# Altium PCB PCB1.PcbDoc
Units mm, origin at the board's own origin, x right, y up, seen from the top; angles counter-clockwise.
Board outline 102 x 102 mm, 2 copper layers (Top Layer, Bottom Layer), stack 1.57 mm thick; 75 components, 45 nets, 245 pads, 31 vias.
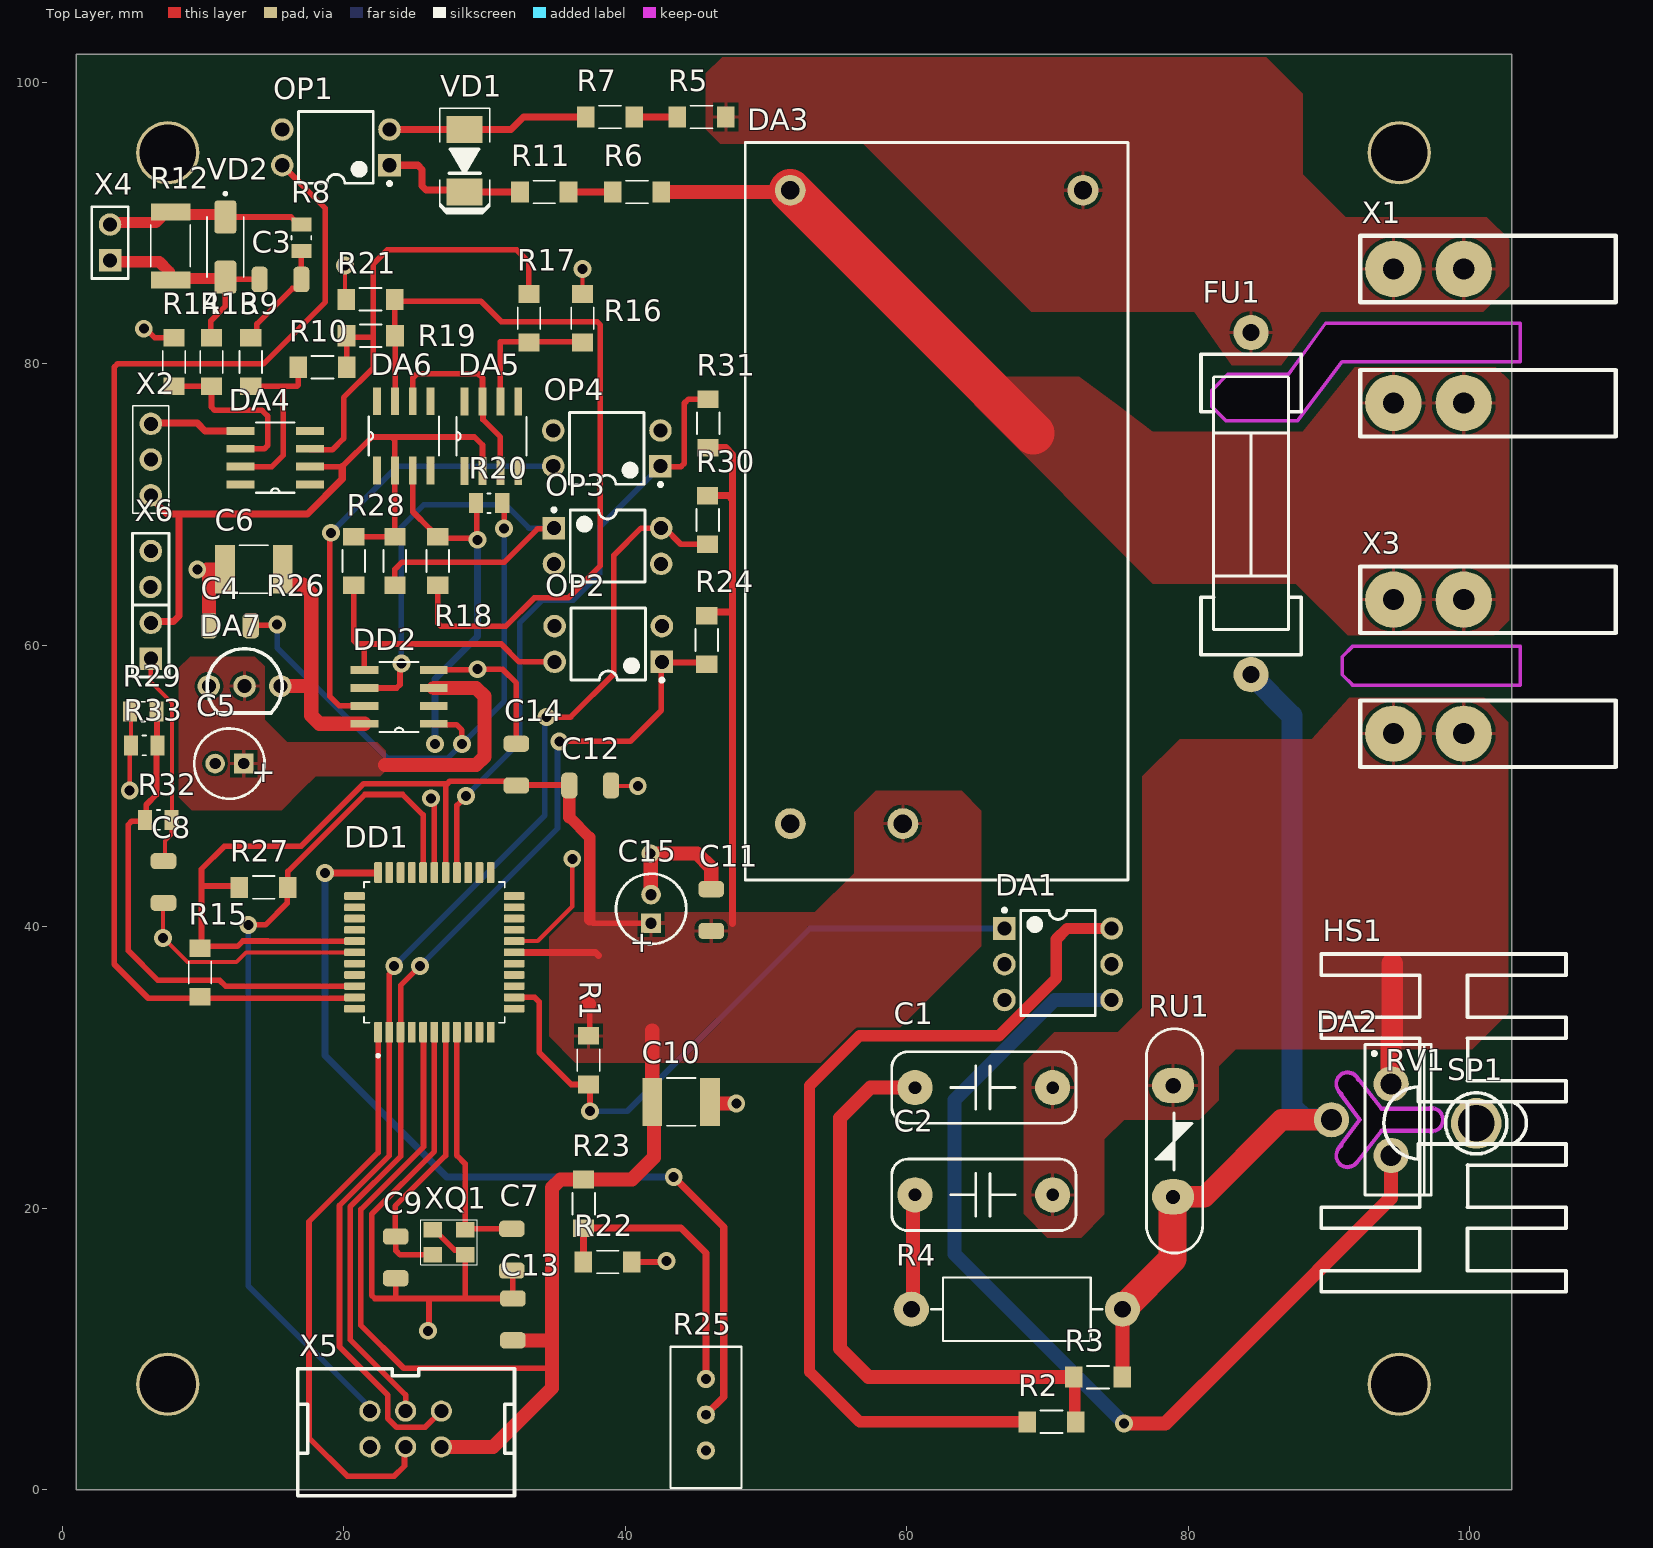
[diagram p0: Top Layer view]
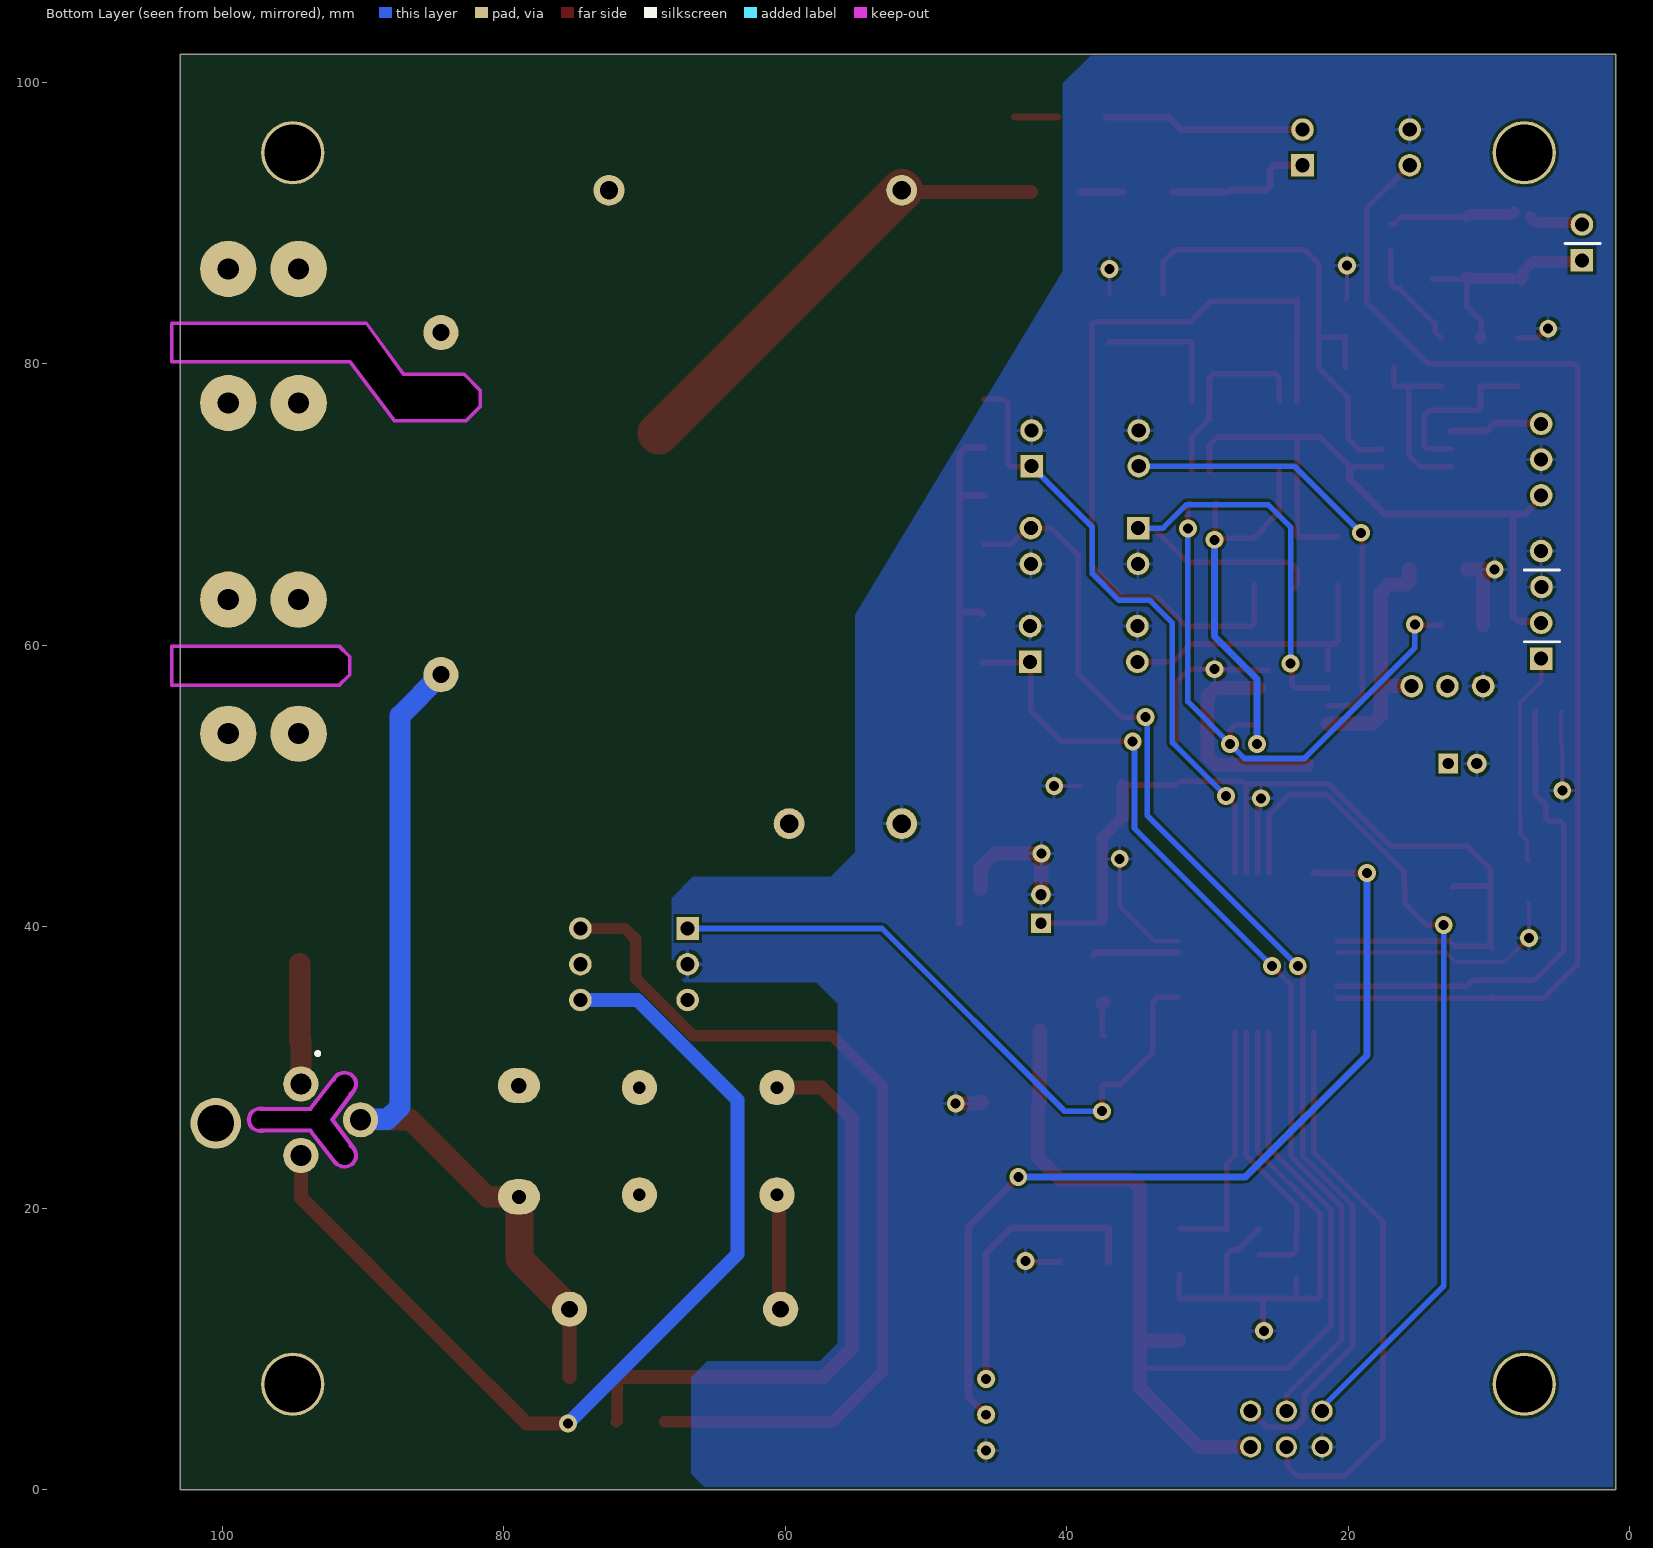
[diagram p1: Bottom Layer view, seen from below]

## Layer stack, top to bottom
Top Solder: solder mask 0.0254, SM-001, Dk 4
Top Layer: signal copper 0.035
Dielectric 1: core 1.5, Core-043, Dk 4.3
Bottom Layer: signal copper 0.035
Bottom Solder: solder mask 0.0254, SM-001, Dk 4

## Board outline
1,0 103,0 103,102 1,102
cut-out: 90.569,24.285 ccw(c91.329,23.754) 92.014,23.129 ccw(c91.964,23.246) 92.065,23.168 93.804,25.405 97.082,25.405 ccw(c97.159,25.506) 97.137,25.381 ccw(c97.298,26.294) 98.225,26.294 ccw(c97.298,26.294) 97.137,27.207 ccw(c97.159,27.082) 97.082,27.183 93.804,27.183 92.065,29.42 ccw(c91.964,29.342) 92.014,29.459 ccw(c91.329,28.834) 90.704,28.149 ccw(c90.821,28.199) 90.718,28.124 92.059,26.295 90.592,24.338 ccw(c90.694,24.262)
cut-out: 81.677,76.967 81.677,78.11 82.82,79.253 87.138,79.253 89.805,82.936 103.6,82.936 103.6,80.142 90.948,80.142 87.773,75.951 82.693,75.951
cut-out: 90.948,57.917 90.948,59.187 91.71,59.949 101.997,59.949 103.6,59.949 103.6,57.155 91.71,57.155

## Design rules (kind name [scope] priority, off if disabled: settings)
Clearance [All] p1: gap=0.2 ignorepadtopadclearanceinfootprint=FALSE
ComponentClearance [All] p1: gap=0.01 collisioncheckmode=3 verticalgap=0.01 showdistances=FALSE
Height [All] p1: minheight=0 maxheight=40 prefheight=12.7
PolygonConnect [All] p1: connectstyle=Relief reliefconductorwidth=0.254 reliefentries=4 polygonreliefangle="90 Angle" airgapwidth=0.254
RoutingVias [All] p1: holewidth=0.711 width=1.27 viastyle="Through Hole" minholewidth=0.711 minwidth=1.27 maxholewidth=0.711 maxwidth=1.27
SolderMaskExpansion [All] p1: expansion=0.102 istentingtop=FALSE
Width Width_1 [All] p1: maxlimit=4 minlimit=0.2 preferedwidth=0.5 minimp=50.000000 maximp=50.000000 favimp=50.000000
Width [All] p2: maxlimit=0.254 minlimit=0.254 preferedwidth=0.254
28 further rules are at their usual default settings.

## Classes and differential pairs
component class Sheet1: C4 C7 C9 C10 C11 C12 C13 C14 C15 DA4 FU1 OP3 R14 R16 R17 R18 R19 R22 R23 R25 R27 R29 RU1 X5 XQ1
component class Sheet2: C3 C4 HS1 R8 R9 RV1 SP1

## Components (designator, comment, footprint, x,y, rotation, side; value= is the part's Value field where it differs from the comment)
C1 "CAP" cap_snubber_1kv_0.01uF 71.644,30.866 r180 top
C2 "CAP" cap_snubber_1kv_0.01uF 71.644,23.246 r180 top
C3 "CAP" "CAP SMD 1206" 13.483,86.762 r180 top (schematic designator C2)
C4 "CAP" "CAP SMD 1206" 13.947,60.638 r0 top (schematic designator C3)
C5 "=Value+''+' '+''" "Radial 5x11mm" 11.884,51.6 r180 top (schematic designator C4)
C6 "CAP" "CAP SMD 1812" 16.388,63.652 r0 top (schematic designator C5)
C7 "CAP" "CAP SMD 1206" 31.184,15.029 r270 top
C8 "5nF" "CAP SMD 1206" 6.438,41.153 r270 top (schematic designator C1)
C9 "CAP" "CAP SMD 1206" 22.938,14.483 r270 top
C10 "CAP" "CAP SMD 1812" 46.741,25.806 r0 top
C11 "CAP" "CAP SMD 1206" 46.879,43.224 r90 top
C12 "CAP" "CAP SMD 1206" 39.552,49.281 r0 top
C13 "CAP" "CAP SMD 1206" 32.782,14.141 r90 top
C14 "CAP" "CAP SMD 1206" 33.036,53.56 r90 top
C15 "=Value+''+' '+''" "Radial 5x11mm" 41.844,41.273 r90 top
DA1 "MOC3050" DIP-6 66.945,39.883 r0 top
DA2 "BTA06-800C" TO-220AB 94.426,26.294 r270 top
DA3 "IRM-5-05" "IRM20-5 (AC-DC)" 48.533,95.734 r270 top
DA4 "lm358" MCP601-I/SN 11.54,75.496 r180 top (schematic designator DA1)
DA5 "MCP601-I/SN" MCP601-I/SN 32.657,78.455 r90 top (schematic designator DA2)
DA6 "MCP601-I/SN" MCP601-I/SN 26.434,78.48 r90 top (schematic designator DA3)
DA7 "MCP1541" TO-92 12.96,57.1 r0 top (schematic designator DA4)
DD1 "aTMEGA16" ATMEGA16 32.922,42.505 r90 top
DD2 "MCP3201" MCP3201 20.507,58.621 r180 top (schematic designator DD1)
FU1 "" FUSE-2 84.471,57.917 r90 top
HS1 "" "Heatsink HS201" 100.6,26.04 r0 top
OP1 "PC817" DIP4 19.447,95.382 r180 top
OP2 "PC817" DIP4 38.8,60.1 r180 top (schematic designator OP1)
OP3 "PC817" DIP4 38.751,67.061 r0 top (schematic designator OP2)
OP4 "PC817" DIP4 38.7,74 r180 top (schematic designator OP3)
R1 "resistor" "Resistor SMD 1206" 38.162,28.112 r90 top
R2 "resistor" "Resistor SMD 1206" 67.887,4.069 r0 top
R3 "resistor" "Resistor SMD 1206" 71.189,7.244 r0 top
R4 "resistor" RES_1W_HOR 67.834,12.832 r0 top
R5 "resistor" "Resistor SMD 1206" 43.016,96.779 r0 top
R6 "resistor" "Resistor SMD 1206" 43.249,92.969 r180 top
R7 "resistor" "Resistor SMD 1206" 36.518,96.779 r0 top
R8 "resistor" "RESISTOR SMD 0805" 17.858,87.39 r90 top (schematic designator R1)
R9 "resistor" "Resistor SMD 1206" 12.638,82.538 r270 top (schematic designator R2)
R10 "resistor" "Resistor SMD 1206" 16.092,78.999 r0 top (schematic designator R3)
R11 "resistor" "Resistor SMD 1206" 31.84,91.445 r0 top
R12 "resistor" "RESISTOR SMD 2010" 9.199,85.228 r90 top
R13 "resistor" "Resistor SMD 1206" 9.844,82.538 r270 top (schematic designator R6)
R14 "resistor" "Resistor SMD 1206" 7.177,82.538 r270 top (schematic designator R8)
R15 "resistor" "Resistor SMD 1206" 10.557,34.348 r90 top
R16 "resistor" "Resistor SMD 1206" 36.211,85.656 r270 top (schematic designator R9)
R17 "resistor" "Resistor SMD 1206" 33.925,80.83 r90 top (schematic designator R10)
R18 "resistor" "Resistor SMD 1206" 25.924,68.405 r270 top (schematic designator R11)
R19 "resistor" "Resistor SMD 1206" 24.338,82.762 r180 top (schematic designator R12)
R20 "resistor" "RESISTOR SMD 0805" 31.91,70.958 r180 top (schematic designator R13)
R21 "resistor" "Resistor SMD 1206" 19.5,83.825 r0 top (schematic designator R14)
R22 "resistor" "Resistor SMD 1206" 36.343,15.422 r0 top
R23 "resistor" "Resistor SMD 1206" 36.29,22.735 r270 top
R24 "resistor" "Resistor SMD 1206" 46.562,57.962 r90 top (schematic designator R15)
R25 "R_3" resperemen 45.482,13.086 r90 top
R26 "resistor" "Resistor SMD 1206" 19.955,68.405 r270 top (schematic designator R16)
R27 "resistor" "Resistor SMD 1206" 16.727,43.566 r180 top
R28 "resistor" "Resistor SMD 1206" 22.876,68.405 r270 top (schematic designator R17)
R29 "resistor" "RESISTOR SMD 0805" 7.34,56.158 r180 top
R30 "resistor" "Resistor SMD 1206" 45.101,71.326 r270 top (schematic designator R18)
R31 "resistor" "Resistor SMD 1206" 46.662,73.362 r90 top (schematic designator R19)
R32 "resistor" "RESISTOR SMD 0805" 5.26,46.742 r0 top (schematic designator R4)
R33 "3.2k" "RESISTOR SMD 0805" 4.26,52.042 r0 top (schematic designator R7)
RU1 "Varistor" VAR_P_10 79.01,24.77 r90 top
RV1 "M3" "Rivet M3" 101.362,26.04 r0 top
SP1 "Soldering pin for HS-201" HeatsinkSolderPin 100.473,26.04 r0 top
VD1 "DIOD" DO-214 28.591,92.207 r180 top
VD2 "VD_TVS" DIOM5226X230N 11.6,88.3 r270 top (schematic designator VD1)
X1 "Connector_in" "PC250-836_90 deg" 99.584,86.746 r90 top
X2 "PLS3" PLS-3 6.3,70.66 r90 top (schematic designator X3)
X3 "connector_out" "PC250-836_90 deg - duplicate" 99.584,63.251 r90 top
X4 "connector_shunt" PLS-02 3.4,87.36 r90 top (schematic designator X2)
X5 "IDC-6MC" IDC-6MS 26.94,5.593 r0 top
X6 "PLS3_1" PLS4 7.594,62.892 r90 top (schematic designator X1)
XQ1 "KX-7T" "KX-7 - duplicate" 27.481,17.593 r0 top

## Footprints (in the part's own frame and the unit in brackets; to place one, negate y for a bottom-side part, rotate by r counter-clockwise, add the part's x,y. Pads: shape width x height; smd on the part's side, far side on the other; paste and mask are expansions set on the pad)
ATMEGA16 [mm]
  rrect25% 1.47x0.55 smd: 1(-9.988,10.477) 2(-9.988,9.677) 3(-9.988,8.877) 4(-9.988,8.077) 5(-9.988,7.277) 6(-9.988,6.477) 7(-9.988,5.677) 8(-9.988,4.877) 9(-9.988,4.077) 10(-9.988,3.277) 11(-9.988,2.477) 23(1.352,2.477) 24(1.352,3.277) 25(1.352,4.077) 26(1.352,4.877) 27(1.352,5.677) 28(1.352,6.477) 29(1.352,7.277) 30(1.352,8.077) 31(1.352,8.877) 32(1.352,9.677) 33(1.352,10.477)
  rrect25% 0.55x1.47 smd: 12(-8.318,0.807) 13(-7.518,0.807) 14(-6.718,0.807) 15(-5.918,0.807) 16(-5.118,0.807) 17(-4.318,0.807) 18(-3.518,0.807) 19(-2.718,0.807) 20(-1.918,0.807) 21(-1.118,0.807) 22(-0.318,0.807) 34(-0.318,12.147) 35(-1.118,12.147) 36(-1.918,12.147) 37(-2.718,12.147) 38(-3.518,12.147) 39(-4.318,12.147) 40(-5.118,12.147) 41(-5.918,12.147) 42(-6.718,12.147) 43(-7.518,12.147) 44(-8.318,12.147)
  silkscreen extent -11.76,1.48 0.68,11.48, body extent -10.32,0.48 1.68,12.48, height 1.2
"CAP SMD 1206" [mm]
  rrect54% 1.15x1.82 smd: 1(-3.517,0.762) 2(-0.547,0.762)
  body extent -3.63,-0.04 -0.43,1.56, height 1.8
"CAP SMD 1812" [mm]
  rect 1.41x3.42 smd: 1(-4.815,1.758) 2(-0.717,1.758)
  silkscreen extent -3.79,0.06 -1.75,3.46, body extent -5.02,0.16 -0.52,3.36, height 2.52
cap_snubber_1kv_0.01uF [mm]
  round 2.5 hole 0.9: 1(1.27,2.286) 2(11.049,2.286)
  silkscreen extent -0.38,-0.25 12.7,4.83, body extent 0.58,-1.44 11.71,5.76, height 9
DIOM5226X230N [mm]
  rrect25% 2.33x1.55 smd: 1(2.135,0) 2(-2.135,0)
  silkscreen extent -3.9,-1.3 2.15,1.3, body extent -2.6,-1.3 2.6,1.3, height 2.4
DIP4 [mm] "DIP, 4-Pin, Row Spacing 7.62 mm, Pitch 2.54 mm"
  rect 1.6x1.6 hole 1: 1(-3.81,1.27)
  round 1.6 hole 1: 2(-3.81,-1.27) 3(3.81,-1.27) 4(3.81,1.27)
  silkscreen extent -3.94,-2.55 2.65,2.69, body extent -4.15,-2.32 4.15,2.38, height 3.5
DIP-6 [mm]
  rect 1.6x1.6 hole 1: 1(0,0)
  round 1.6 hole 1: 2(0,-2.54) 4(7.62,-5.08) 6(7.62,0) ""(0,-5.08) ""(7.62,-2.54)
  silkscreen extent -0.12,-6.17 6.46,1.42, body extent -0.25,-6.18 7.85,1.12, height 4
DO-214 [mm] "DO-214 Diode"
  rect 2.54x1.905 smd: 1(0,-4.445) 2(0,0)
  silkscreen extent -1.78,-5.97 1.78,1.52, body extent -1.98,-5.07 1.97,0.53, height 2.62
FUSE-2 [mm] "FUSE 10A 250V 5x20mm  with holder"
  round 2.5 hole 1.2: 1(0,0) 2(24.31,0)
  silkscreen extent 1.42,-3.56 22.76,3.56, body extent -0.37,-3 24.73,2.98, height 6.49
"Heatsink HS201" [mm] "Heatsink HS201 40 mm"
  silkscreen extent -11.15,-11.97 6.25,12.03, body extent -10.22,-11.7 5.68,11.8, height 40
HeatsinkSolderPin [mm] "HeatsinkSolderPin"
  round 3.6 hole 2.6 unplated mask+0: 1(0,0)
  silkscreen extent -2.17,-2.17 2.17,2.17, body extent -1.25,-1.25 1.25,1.25, height 8.6
IDC-6MS [mm] "Fast Connect  90deg .250"
  round 1.5 hole 1: 1(0,0) 2(0,-2.54) 3(-2.54,0) 4(-2.54,-2.54) 5(-5.08,0) 6(-5.08,-2.54)
  silkscreen extent -10.2,-6 5.2,3, body extent -10.15,-5.87 5.07,2.98, height 1.77
"IRM20-5 (AC-DC)" [mm]
  round 2.2 hole 1.3: 1(48.4,11.2) 2(48.4,3.2) 3(3.4,24) 4(3.4,3.2)
  silkscreen extent 0,0 52.4,27.2, body extent 0,0 52.4,27.2, height 24
"KX-7 - duplicate" [mm]
  rect 1.3x1.1 smd: 1(-1.15,-0.9) 2(-1.15,0.9) 3(1.15,0.9) 4(1.15,-0.9)
  silkscreen extent -2,-1.6 2,1.6, body extent -1.61,-1.25 1.61,1.25, height 0.81
MCP601-I/SN [mil]
  rect 78x22 smd: 1(-44.57,110.08) 2(-44.57,60.08) 3(-238.57,60.08) 4(-238.57,110.08) 5(-44.57,10.08) ""(-238.57,160.08) ""(-238.57,10.08) ""(-44.57,160.08)
  silkscreen extent -196,-13 -88,183, body extent -260,-11 -23,182, height 67
MCP3201 [mil]
  rect 78x22 smd: 1(-232,165) 2(-232,115) 3(-232,65) 4(-232,15) 5(-38,15) 6(-38,65) 7(-38,115) 8(-38,165)
  silkscreen extent -189,-8 -81,188, body extent -253,-6 -17,186, height 67
"PC250-836_90 deg" [mm] "Fast Connect  90deg .250"
  round 4 hole 1.5: 1(0,0) 1/2(0,5) 2(-9.525,0) 2/2(-9.525,5)
  silkscreen extent -11.9,-10.8 2.35,7.35, body extent -9.93,-9.98 0.4,6.42, height 10.65
"PC250-836_90 deg - duplicate" [mm] "Fast Connect  90deg .250"
  round 4 hole 1.5: 1(-9.525,5) 1(-9.525,0) 2(0,5) 2(0,0)
  silkscreen extent -11.9,-10.8 2.35,7.35, body extent -9.93,-9.98 0.4,6.42, height 10.65
PLS4 [mm]
  rect 1.6x1.6 hole 1: 1(-3.832,1.294)
  round 1.6 hole 1: 2(-1.292,1.294) 3(1.258,1.319) 4(3.808,1.294)
  silkscreen extent -5.13,-0.01 5.07,2.59, body extent -5.1,0.02 5.08,2.56, height 9.98
PLS-02 [mm] "Разъем PLS-2 Pitch 2.54mm"
  rect 1.6x1.6 hole 1: 1(0,0)
  round 1.6 hole 1: 2(2.54,0)
  silkscreen extent -1.3,-1.3 3.8,1.3, body extent -1.27,-1.27 3.81,1.27, height 9.98
PLS-3 [mm]
  round 1.6 hole 1: 1(0,0) 2(2.54,0) 3(5.08,0)
  silkscreen extent -1.28,-1.28 6.35,1.28, body extent -1.27,-1.27 6.35,1.27, height 9.98
"Radial 5x11mm" [mm] "Polar Capacitor Radial 5x11mm, Pitch 2.5mm"
  rect 1.4x1.4 hole 0.8: 1(-1.016,0)
  round 1.4 hole 0.8: 2(1.016,0)
  silkscreen extent -2.5,-2.5 2.5,2.5, body extent -2.5,-2.48 2.5,2.52, height 11
RES_1W_HOR [mm] "Resistor 1W Hor Pitch 15 mm"
  round 2.5 hole 1.2: 1(-7.5,0) 2(7.5,0)
  silkscreen extent -6.1,-2.25 6.1,2.25, body extent -7.98,-1.87 7.95,1.88, height 3.62
"RESISTOR SMD 0805" [mm]
  rect 1x1.42 smd: 1(0.64,0.858) 2(2.51,0.858)
  silkscreen extent 1.45,0.16 1.69,1.56, body extent 0.57,0.23 2.57,1.48, height 0.6
"Resistor SMD 1206" [mm]
  rect 1.25x1.5 smd: 1(0.688,0.762) 2(4.138,0.762)
  silkscreen extent 1.63,-0.04 3.19,1.56, body extent 0.81,-0.04 4.01,1.56, height 0.6
"RESISTOR SMD 2010" [mm]
  rect 1.21x2.81 smd: 1(0.74,1.499) 2(5.572,1.499)
  silkscreen extent 1.67,0.1 4.65,2.9, body extent 0.62,0.23 5.7,2.77, height 0.89
resperemen [mm]
  round 1.3 hole 0.7: 1(-10.287,-0.254) 2(-5.207,-0.254) 3(-7.747,-0.254)
  silkscreen extent -12.95,-2.79 -2.92,2.25, body extent -14.1,-2.67 -2.97,2.16, height 10.03
"Rivet M3" [mm]
  silkscreen extent -7.45,-2.54 2.68,2.6, body extent -6.98,-2.91 1.02,2.98, height 22.48
TO-92 [mm] "TO-92"
  round 1.6 hole 1: 1(0,0) 2(2.54,0) 3(-2.54,0)
  silkscreen extent -2.66,-1.91 2.66,2.66, body extent -2.8,-1.65 2.8,2.28, height 10.7
TO-220AB [mm] "TO, Thru-Hole, Vertical, Heatsink Mounted; 3 In-Line Leads; Pitch 2.54 mm"
  round 2.5 hole 1.5: 1(-2.54,0) 2(0,-4.24) 3(2.54,0)
  silkscreen extent -5.35,-1.85 5.35,2.85, body extent -5.2,-4.6 5.2,3.05, height 22.5
VAR_P_10 [mm] "Varistor P10 mm"
  oval 2.5x3 hole 1: 1(-3.95,0.075)
  oval 2.5x3 hole 1.1: 2(3.95,0.075)
  silkscreen extent -7.95,-2.02 7.99,1.98, body extent -5.5,-1.71 5.5,1.8, height 12.5

## Part data
C5 C15: library part CapPol
C8: library part CAP
DA2: library part triac
DA4 DA5 DA6: library part op
DA7: library part Uopo
DD1: library part "aTMEGA16_32 PIN"
FU1: library part Fuse
HS1: library part "Heatsink HS-201", "Heatsink", Part Number=HS-201-40, Description Doc="Heatsink HS-201", Footpirnt Doc="Heatsink HS-201", Type Eng=Heatsink, Type Rus=Радиатор
R5: library part "2W RES"
R25 R33: library part resistor
RV1: library part RivetM3(TO220AB), "Rivet", Description Doc=Rivet, Type Eng=Rivet, Type Rus=Заклепка
SP1: library part HeatsinkSolderingPin, "Soldering Pin", Description Doc="Soldering pin for HS-201", Type Eng="Soldering Pin", Type Rus=Шпилька
X5: library part Connector_in

## Free pads (board coordinates)
  round 4.5 hole 4: 2(7.5,7.5) 2(7.5,95) 2(95,7.5) 2(95,95)

## Via types
v1: diameter 1.27, hole 0.711, Top Layer to Bottom Layer, 31 vias

## Nets (pads, with @x,y where several pads share a name; then routed paths per layer and width w, separated by ;. In a path a pad name is that pad's centre, name@x,y a point inside that pad or via, vN(x,y) a via of type N, cw(c..) or ccw(c..) an arc to the next point about the centre after c; other vN are vias at no path point)
+5V: DA4.4 DA5.4 DA6.4 R26.1 R28.1 X2.1 X6.2 | length 50.9
  Top Layer w0.4: DA4.4 19.9,72.7 22.008,74.808 23.404,74.808 ; R26.1 R28.1 DA6.4 23.638,74.574 23.404,74.808 ; DA5.4 29.861,74.234 29.287,74.808 23.404,74.808
  Top Layer w0.5: X6.2 6.4,61.7 7.9,61.7 8.3,62.1 8.3,69.347 ; X2.1 6.3,70.5 7.453,69.347 8.3,69.347 ; 19.9,72.7 19.9,71.824 17.423,69.347 8.3,69.347
+5V_M: C10.1 C11.1 C12.1 C13.1 C14.1 C15.1 DA3.1 DD1.5 DD1.17 DD1.27 DD1.38 R1.2 R15.2 R23.1 R24.2 R27.2 R30.1 R31.1 X5.2 | length 198
  Top Layer w0.4: R15.2 R15.2@9.9,38.591 ; R27.2 12.493,42.9 9.9,42.9 ; DD1.38 14.628,38.987 14.621,38.994 12.843,38.994 12.462,38.613 9.922,38.613 R15.2@9.9,38.591 ; DD1.5 25.67,32.492 25.67,24.37 21.225,19.925 21.225,11.689 24.273,8.641 34.814,8.641 ; DD1.27 27.245,50.058 27.357,50.17 ; C14.1 31.982,50.335 27.522,50.335 27.357,50.17 ; C14.1@32.274,50.082 35.996,50.082 C12.1 ; R1.2 37.478,32.328 37.478,34.515 ; 37.481,40.498 37.715,40.264 41.837,40.264 C15.1 ; R15.2@9.9,38.591 9.9,42.9 ; 9.9,42.9 9.9,44.1 11.525,45.725 16.976,45.725 21.421,50.17 27.357,50.17
  Top Layer w0.5: DD1.17 37.907,38.187 38.116,37.978 ; R30.1 47.348,70.638 47.641,70.345 ; R31.1 47.15,74.05 47.641,73.559 47.641,70.345 ; R24.2@45.99,62.235 46.117,62.362 47.641,62.362 ; 47.641,40.257 47.641,62.362 ; 47.641,62.362 47.641,70.345
  Top Layer w0.8: 36.035,47.806 37.481,46.36 37.481,40.498
  Top Layer w0.9: 36.035,47.806 C12.1 ; 37.353,34.64 37.478,34.515
  Top Layer w1: X5.2 30.623,3.053 34.814,7.244 34.814,8.641 34.814,10.673 ; C13.1 34.765,10.624 34.814,10.673 ; 41.926,32.644 C10.1 42.053,27.437 42.053,23.627 40.473,22.047 R23.1 35.4,22.047 34.814,21.461 34.814,10.673
-5V: DA4.5 X2.3 | length 6.6
  Top Layer w0.5: X2.3 6.36,75.8 9.6,75.8 10.16,75.24 DA4.5
COM: DA3.4 R6.1 X1.2 X3.2 | length 33.6
  Top Layer w1: R6.1 51.606,92.207 DA3.4
  Top Layer w3: DA3.4 68.994,75.073
CS: DD1.26 OP4.1 R31.2 | length 44
  Top Layer w0.4: DD1.26 28.045,48.631 28.7,49.286 v1(28.7,49.3) ; OP4.1 42.54,72.7 43.966,72.7 44.2,72.934 44.2,77.2 44.5,77.5 R31.2
  Bottom Layer w0.4: v1(28.7,49.3) 32.5,53.1 32.5,61.6 34.1,63.2 36.3,63.2 38.2,65.1 38.2,68.42 OP4.1
GND: C4.1 C5.2 C6.1 C7.2 C8.2 C9.2 C10.2 C11.2 C12.2 C13.2 C14.2 C15.2 DA1.2 DA3.2 DA7.3 DD1.6 DD1.18 DD1.28 DD1.39 DD2.4 OP1.3 OP2.2 OP2.3 OP3.2 OP3.3 OP4.2 OP4.3 R14.1 R16.1 R21.1 R22.2 R25.1 R29.2 R33.1 X2.2 X5.6 X6.3 X6.4 XQ1.2 XQ1.4 | length 118.2
  Top Layer w0.3: v1(4.8,49.7) 4.8,52.8 R33.1 4.9,55.23 R29.2 ; C8.2 7.156,41.656 v1(7.156,39.2) 7.211,39.2 8.9,37.511 12.376,37.511 13.052,38.187 DD1.39 DD1.39@20.801,38.161 ; v1(20.1,87) 20.1,84.675 R21.1 ; DD1.18@32.089,39.013 DD1.18 33.791,38.987 36.246,41.442 v1(36.246,44.836) ; C14.2@32.272,53.011 C14.2 ; R16.1 v1(36.973,86.746) ; C12.2 39.068,49.98 39.132,50.043 39.175,50 v1(40.9,50)
  Top Layer w0.4: v1(5.8,82.5) 5.939,82.5 6.589,81.85 R14.1 ; C9.2 23.7,13.594 ; DD2.4@25.689,58.24 DD2.4 26.432,58.272 29.467,58.272 v1(29.5,58.305) 31.295,58.305 32.274,57.326 C14.2 ; v1(26,11.3) 26.067,11.367 26.067,13.543 26.118,13.594 ; v1(26.21,49.135) 26.21,48.9 26.445,48.665 DD1.28 ; XQ1.2 26.431,18.493 27.881,17.043 28.281,17.043 XQ1.4 28.631,13.594 ; DD1.6 26.445,24.041 21.987,19.583 21.987,13.828 22.221,13.594 23.7,13.594 ; C7.2@32,15.3 32.01,15.29 32.01,13.604 C13.2 28.631,13.594 ; v1(36.973,86.746) v1@36.973,86.981 ; R22.2 42.865,16.184 v1(42.942,16.261) ; 23.7,13.594 26.118,13.594 ; 26.118,13.594 28.631,13.594
  Top Layer w1: C4.1 10.43,65.27 10.3,65.4 11.563,65.4 C6.1 ; C15.2 41.821,42.312 41.821,45.195 v1(41.799,45.217) 45.101,45.217 46.117,44.201 C11.2 ; C10.2 46.151,27.437 v1(47.895,27.437)
  other v1: 9.6,65.4
Hall_sensor: DD1.42 R29.1 R32.1 R33.2 | length 35.5
  Top Layer w0.4: R29.1 6.735,55.265 6.735,52.935 R33.2 6.7,52.83 6.7,49.4 5.976,48.676 5.976,47.676 R32.1 5.8,47.5 4.934,47.5 4.7,47.266 4.7,38.3 6.8,36.2 11.2,36.2 11.613,35.787 DD1.42
Id: DD1.33 R25.3 | length 64
  Top Layer w0.5: v1(18.685,43.82) 18.703,43.839 22.427,43.839 DD1.33 ; v1(43.45,22.23) 47.006,18.674 47.006,6.609 R25.3
  Bottom Layer w0.5: v1(18.685,43.82) 18.685,30.866 27.321,22.23 v1(43.45,22.23)
MISO: DD1.2 OP3.4 R30.2 X5.1 | length 84.3
  Top Layer w0.4: v1(23.593,37.215) 23.593,36.979 23.245,36.632 DD1.2 23.245,23.742 19.701,20.198 19.701,10.165 23.13,6.736 23.13,5.071 23.758,4.443 25.79,4.443 X5.1 ; v1(34.4,54.9) 36.115,54.9 39.2,57.985 39.2,66.4 41.131,68.331 42.811,68.331 43.954,67.188 R30.2
  Bottom Layer w0.4: v1(23.593,37.215) 34.286,47.909 34.286,54.786 v1(34.4,54.9)
MOSI: DD1.1 X5.4 | length 40.5
  Top Layer w0.4: DD1.1 22.445,23.958 17.542,19.055 17.542,3.688 20.262,0.968 23.585,0.968 24.32,1.703 24.32,2.973 X5.4
NetC1_1: C1.1 C2.1 DA2.1 RU1.2 X3.1 | length 9.4
  Top Layer w1.5: RU1.2@79.185,28.72 RU1.2 RU1.2@79.376,29.161 ; DA2.1 94.426,31.882 ; 94.504,31.882 94.504,37.404
NetC1_2: C1.2 R2.2 R3.1 | length 43.3
  Top Layer w0.8: R3.1 71.951,7.932 71.951,4.905 R2.2
  Top Layer w1: C1.2 57.42,28.58 55.261,26.421 55.261,10.038 57.293,8.006 R3.1
NetC2_2: C2.2 R4.1 | length 8.2
  Top Layer w1: R4.1 60.465,12.962 60.465,20.83 C2.2
NetC3_1: C3.1 R8.1 R9.1 | length 7.8
  Top Layer w0.4: R9.1 13.412,81.85 13.837,82.275 13.837,82.837 16.358,85.358 16.633,85.358 17,85.725 R8.1
NetC3_2: C3.2 R12.1 R13.1 VD2.1 X4.1 | length 15.1
  Top Layer w0.4: R13.1@10.553,81.903 10.553,83.053 11.6,84.1 11.6,86 VD2.1 11.765,86 C3.2
  Top Layer w0.8: X4.1@3.961,87.254 6.901,87.254 7.6,86.555 R12.1@7.6,86.165 ; R12.1 R12.1@7.799,86.067 ; R12.1@8.299,86.067 11.501,86.067 VD2.1 ; R13.1@10.553,81.903 R13.1
NetC4_2: C4.2 DD2.1 R20.1 | length 41.9
  Top Layer w0.4: C4.2 13.441,61.441 15.237,61.441 v1(15.279,61.483) ; DD2.1 26.465,54.365 28.018,54.365 28.4,53.983 v1(28.4,53) ; R20.1 31.4,69.97 v1(31.4,68.3)
  Bottom Layer w0.4: v1(15.279,61.483) 15.279,59.821 23.135,51.965 27.365,51.965 v1(28.4,53) 31.4,56 v1(31.4,68.3)
NetC5_1: C5.1 DA7.1 DD2.3 | length 15.7
  Top Layer w0.4: C5.1@12.96,51.66 C5.1 C5.1@13,51.5
  Top Layer w1: 22.94,51.5 29.414,51.5 30,52.086 30,56.384 29.414,56.97 DD2.3
NetC6_2: C6.2 DA7.2 DD2.8 | length 18.2
  Top Layer w1: DA7.2 17.7,57.1 ; C6.2 15.671,64.522 15.876,64.317 17.114,64.317 17.7,63.731 17.7,57.1 ; DD2.8 18.286,54.43 17.7,55.016 17.7,57.1
NetC7_1: C7.1 DD1.8 XQ1.3 | length 17.6
  Top Layer w0.4: DD1.8 28.045,23.755 28.631,23.169 XQ1.3 28.685,18.546 C7.1
NetC8_1: C8.1 R32.2 X6.1 | length 15.3
  Top Layer w0.3: X6.1 6.3,57.4 7.023,56.677 7.027,56.677 7.8,55.905 7.8,47.63 R32.2 7.77,46.57 7.3,46.1 7.3,44.77 C8.1
NetC9_1: C9.1 DD1.7 XQ1.1 | length 19.8
  Top Layer w0.4: XQ1.1 24.007,16.693 23.7,17 C9.1 23.659,18.041 23.659,20.159 27.245,23.745 DD1.7
NetDA1_4: DA1.4 DA2.3 | length 70.9
  Top Layer w1: DA1.4 DA1.4@74.68,34.688 ; v1(75.454,4.704) 78.375,4.704 83.963,10.292 94.426,20.755 DA2.3
  Bottom Layer w1: DA1.4 70.501,34.803 63.389,27.691 63.389,16.769 v1(75.454,4.704)
NetDA1_6: DA1.6 R2.1 | length 65
  Top Layer w0.8: R2.1 56.669,4.831 53.102,8.398 53.102,28.707 56.658,32.263 66.564,32.263 70.628,36.327 70.628,39.121 71.39,39.883 DA1.6
NetDA2_2: DA2.2 FU1.1 R3.2 R4.2 RU1.1 | length 62.9
  Top Layer w1: R3.2 75.331,8.01 75.331,12.828 R4.2
  Top Layer w1.5: RU1.1 81.156,20.82 86.63,26.294 DA2.2
  Top Layer w2: R4.2 78.9,16.398 78.9,20.589 78.935,20.624 RU1.1
  Bottom Layer w1.5: FU1.1 87.392,54.996 87.392,27.207 88.271,26.328 90.152,26.328 DA2.2
NetDA3_3: DA3.3 FU1.2 R5.2 X1.1
NetDA4_1: DA4.1 R9.2 R10.1 | length 12.9
  Top Layer w0.4: DA4.1 14.9,72.7 15.7,73.5 15.7,78.4 ; R9.2 15.7,78.4 ; R10.1 16.78,78.5 16.68,78.4 15.7,78.4
NetDA4_2: DA4.2 R13.2 R14.2 | length 12.5
  Top Layer w0.4: R14.2 10.564,78.4 10.585,78.421 R13.2 10.606,76.934 10.84,76.7 14.2,76.7 14.6,76.3 14.6,74.204 14.366,73.97 DA4.2
NetDA4_3: DA4.3 R10.2 R17.2 R19.2 | length 34.3
  Top Layer w0.4: DA4.3 17.67,73.9 19.2,73.9 20,74.7 20,77.6 22.1,79.7 22.1,81.9 ; R19.2 R19.2@20.23,81.97 ; R10.2 R19.2@20.23,81.97 ; R17.2 33.163,87.237 32.3,88.1 23.1,88.1 22.1,87.1 22.1,81.9 ; R19.2@20.23,81.97 20.3,81.9 22.1,81.9
NetDA5_1: DA5.1 DA5.3 DA6.2 | length 14
  Top Layer w0.4: DA6.2 24.908,78.999 25.209,79.3 29.56,79.3 29.861,78.999 DA5.1 29.898,77.286 29.898,76.041 31.131,74.808 DA5.3
NetDA5_2: DA5.2 R16.2 R17.1 | length 10.1
  Top Layer w0.4: DA5.2 31.131,81.56 36.931,81.56 R16.2
NetDA6_1: DA6.1 R18.2 R19.1 R21.2 | length 55.8
  Top Layer w0.4: DA6.1 23.659,77.369 23.659,82.174 23.638,82.195 R21.2 23.765,84.46 26.686,84.46 29.74,84.46 31.2,83 38.009,83 38.243,82.766 38.243,65.664 35.957,63.378 33.544,63.378 31.512,61.346 26.92,61.346 26.686,61.58 R18.2
NetDA6_3: DA6.3 R18.1 R20.2 | length 26.9
  Top Layer w0.4: DA6.3 24.908,69.495 26.136,68.267 26.136,68.142 26.561,67.717 R18.1 26.803,67.6 29.4,67.6 v1@29.45,67.55 ; R20.2 29.45,70.05 v1@29.45,67.55 ; v1(29.5,67.5) v1@29.45,67.55
  Top Layer w0.5: v1(26.5,53) v1@26.695,53
  Bottom Layer w0.5: v1(26.5,53) 26.5,57.618 29.5,60.618 v1(29.5,67.5)
NetDD2_5: DD2.5 OP2.4 R26.2 | length 20.7
  Top Layer w0.4: R26.2 20.717,60.334 20.951,60.1 21.334,60.1 21.472,60.1 31.2,60.1 32.47,58.83 OP2.4 ; 21.334,60.071 21.472,59.933 DD2.5
NetDD2_6: DD2.6 OP3.1 R28.2 | length 40.2
  Top Layer w0.4: DD2.6 23.766,56.97 24,57.204 24,58.6 v1(24.1,58.7) ; R28.2@24,63.905 R28.2 23.638,65.41 24.146,65.918 31.418,65.918 33.775,68.275 34.885,68.275 OP3.1
  Bottom Layer w0.4: v1(24.1,58.7) 24.1,68.4 25.7,70 31.5,70 33.169,68.331 OP3.1
NetDD2_7: DD2.7 OP4.4 | length 32.2
  Top Layer w0.4: v1(19.1,68) 19.003,67.903 19.003,56.397 19.7,55.7 DD2.7
  Bottom Layer w0.4: v1(19.1,68) 23.83,72.73 OP4.4
NetOP1_1: OP1.1 R11.1 VD1.2 | length 10.7
  Top Layer w0.5: OP1.1 25.27,94.112 25.562,93.819 25.562,92.646 25.855,92.353 28.445,92.353 VD1.2 R11.1
NetOP1_2: OP1.2 R7.1 VD1.1 | length 14.3
  Top Layer w0.5: OP1.2 VD1.1 31.893,96.652 32.782,97.541 R7.1
NetR5_1: R5.1 R7.2 | length 3
  Top Layer w0.5: R7.2 R5.1
NetR6_2: R6.2 R11.2 | length 3.1
  Top Layer w0.5: R11.2 R6.2
NetR8_2: R8.2 R12.2 VD2.2 X4.2 | length 13
  Top Layer w0.4: VD2.2 16.255,90.435 16.79,89.9 R8.2
  Top Layer w0.8: X4.2 3.553,90.053 6.664,90.053 R12.2@7.039,90.428 ; R12.2@8.2,90.8 8.382,90.617 11.418,90.617 VD2.2
NetR22_1: R22.1 R23.2 R25.2 | length 20.8
  Top Layer w0.5: R22.1 37.031,18.576 R23.2 43.958,18.597 45.736,16.819 R25.2
PWM: DA1.1 DD1.13 R1.1 | length 46.7
  Top Layer w0.4: DD1.13 33.579,34.987 33.9,34.666 33.9,31.074 36.174,28.8 R1.1 37.5,28.7 v1(37.5,26.9)
  Bottom Layer w0.4: v1(37.5,26.9) 40.149,26.9 53.132,39.883 DA1.1
RESET: DD1.29 R27.1 X5.5 | length 60.4
  Top Layer w0.4: v1(13.224,40.137) 14.437,40.137 15.988,41.688 15.988,42.753 R27.1 16.039,43.939 21.508,49.408 24.192,49.408 25.645,47.955 DD1.29
  Bottom Layer w0.4: v1(13.224,40.137) 13.224,14.483 21.86,5.847 X5.5
SCLK: DD1.3 OP2.1 R24.1 X5.3 | length 70.4
  Top Layer w0.4: X5.3 24.4,6.736 20.463,10.673 20.463,20.111 24.045,23.693 24.045,35.845 v1(25.416,37.216) ; v1(35.321,53.176) 40.36,53.176 42.561,55.377 42.561,58.781 OP2.1 42.655,58.785 R24.1@45.99,58.785
  Bottom Layer w0.4: v1(25.416,37.216) 35.195,46.995 35.195,53.049 v1(35.321,53.176)
ZERO_CROSS: DD1.43 OP1.4 R15.1 | length 88.5
  Top Layer w0.4: OP1.4 18.7,91.049 18.7,84.4 14.3,80 3.933,80 3.699,79.766 3.699,37.343 6.112,34.93 9.689,34.93 R15.1 9.901,34.93 20.718,34.93 DD1.43
pads on no net: DA1. DA4. DA5. DA5.5 DA6. DA6.5 DD1.4 DD1.9 DD1.10 DD1.11 DD1.12 DD1.14 DD1.15 DD1.16 DD1.19 DD1.20 DD1.21 DD1.22 DD1.23 DD1.24 DD1.25 DD1.30 DD1.31 DD1.32 DD1.34 DD1.35 DD1.36 DD1.37 DD1.40 DD1.41 DD1.44 DD2.2 SP1.1 X1.1/2 X1.2/2

## Polygon pours and split planes (outlines as drawn)
COM on Top Layer "COM_L01_P002" (solid, remove dead copper, pour order 2): 101.87,79.761 91.837,79.761 88.142,75.189 77.499,75.189 74.955,77.085 72.277,79.08 66.807,79.08 64.812,77.085 77.499,64.394 81.169,64.394 87.646,64.394 91.329,60.711 101.743,60.711 102.8,61.768 102.8,78.831
NetDA3_3 on Top Layer "NETDA3_3_L01_P017" (solid, remove dead copper, pour order 17): 102.8,85.517 102.8,88.864 101.235,90.429 91.202,90.429 88.154,93.477 88.154,95.636 88.154,99.192 85.546,101.8 46.9,101.8 45.739,100.639 45.739,96.661 46.764,95.636 56.912,95.636 68.85,83.698 70.501,83.698 80.432,83.698 83.099,79.888 84.344,79.888 86.634,79.888 89.424,83.698 100.981,83.698
+5V_M on Top Layer "+5V_M_L01_P019" (solid, remove dead copper, pour order 19): 57.801,49.662 63.902,49.662 65.307,48.246 65.307,38.626 57.039,30.358 36.465,30.358 34.6,32.223 34.6,39.288 36.338,41.026 53.483,41.026 56.277,43.82 56.277,48.138
NetC1_1 on Top Layer "Top Layer-NetC1_1" (solid, remove dead copper, pour order 20): 68.305,19.6 69.993,17.912 72.406,17.912 74.057,19.563 74.057,21.976 74.057,24.897 75.454,26.294 80.788,26.294 82.185,27.691 82.185,30.104 83.381,31.3 100.2,31.3 102.759,33.859 102.759,38.867 102.759,54.541 101.034,56.266 91.456,56.266 88.789,53.345 79.391,53.345 76.754,50.708 76.754,34.254 75.017,32.517 70.501,32.517 68.305,30.321
NetC5_1 on Top Layer "NETC5_1_L01_P021" (solid, pour order 21): 9.1,59.2 13.7,59.2 14.4,58.5 14.4,54.7 16,53.1 22.4,53.1 23,52.5 23,51.1 22.6,50.7 18,50.7 17,49.7 15.6,48.3 9.2,48.3 8.3,49.2 8.3,58.4
no net on Top Layer "NONET_L01_P016" (solid, pour order 16): 4.842,73.411
no net on Top Layer "NONET_L01_P010" (solid, pour order 10): 56.15,42.296
no net on Top Layer "NONET_L01_P000" (solid, pour order 0): 24.019,91.572
GND on Bottom Layer "GND_L02_P014" (solid, remove dead copper, pour order 14): 1.2,101.9 1.2,0.203 65.74,0.197 66.691,1.148 66.691,8.006 65.548,9.149 57.546,9.149 56.277,10.418 56.277,34.549 57.801,36.073 67.199,36.073 68.088,36.962 68.088,42.042 66.564,43.566 56.785,43.566 55.044,45.307 55.044,62.161 40.275,86.589 40.275,99.925 38.3,101.9

## Keep-outs
Keep-Out Layer:
  lines w0.254: 90.694,24.262 92.218,26.294 90.821,28.199 ; 90.929,24.447 ccw(c91.329,23.754) 92.022,23.354 ; 90.929,28.141 cw(c91.329,28.834) 92.081,29.108 ; 91.65,57.155 103.6,57.155 ; 91.65,59.949 103.6,59.949 ; 91.71,57.155 90.948,57.917 90.948,59.187 91.71,59.949 ; 91.964,23.246 93.742,25.532 97.298,25.532 ; 91.964,29.342 93.742,27.056 97.298,27.056 ; 97.159,25.506 ccw(c97.298,26.294) 97.159,27.082 ; 103.6,57.155 103.6,58.552 103.6,59.949 ; 103.6,57.155 103.6,57.155 ; 103.6,59.949 103.6,59.949 ; 81.677,76.967 81.677,78.11 82.82,79.253 87.138,79.253 89.779,82.9 103.589,82.9 103.589,80.153 103.6,80.142 90.948,80.142 87.773,75.951 87.138,75.951 82.693,75.951 81.677,76.967

## Silkscreen, mask and mechanical layers (free items; w line width, h text height)
Mechanical 1:
  the board outline again, w1.2

## Text inside footprints (layer, text, board x,y; h text height)
C5: Top Overlay "+" at 15.184,51.6 h1.5 r180
C15: Top Overlay "+" at 41.844,37.973 h1.5 r90
XQ1: Mechanical 10 "KX-7" at 25.956,14.943 h0.8